# EAGLE board Safety Sensors (EAGLE 7.6.0)

Size 73.58 x 190.39 mm. Coordinates in mm from the lower left corner, seen from the top.
Outline: 0,0 56.82,0 56.82,53.33 0,53.33 0,0
Copper layers (1*16): Top 0.035mm / dielectric 1.5mm / Bottom 0.035mm
Design rules "default": minimum track width 10mil, minimum drill 24mil, track to track 8mil, track to pad 8mil, pad to pad 8mil, via to via 8mil, smd to smd 8mil, copper to edge 40mil, drill to drill 8mil, minimum pad ring 10mil, minimum via ring 8mil, stop-mask expansion 4mil, vias tented up to drill 0mil, thermal gap 10mil

## Footprints (pad centres in the part's own frame; a part is rotated, then mirrored left to right if it is on the bottom)
LED-RGB-THRU = drill 0.762 pad 0.889 long: 1 1.905,0; 2 0.635,0; 3 -0.635,0; 4 -1.905,0
SNR6-D19.0MM = drill 1.3 pad 2: 1 -3.355,3.355; 2 -3.355,-3.355; 3 3.355,3.355; 4 3.355,-3.355; 5 0,4.75; 6 0,-4.75
PIEZO-22MM = drill 1 pad 2.54: P$1 -5,0; P$2 5,0
0207/10 = drill 0.813 octagon: 1 -5.08,0; 2 5.08,0
B25V = drill 0.813 long: A 2.54,0.635; E -2.54,0.635; S 0,0.635
SW2-12.7-12.0X3.6X3.6MM = drill 0.8 square: 1 6.35,0 | drill 0.8: 2 -6.35,0
ARDUINO_UNO = drill 1.016 pad 1.88: 0 63.5,50.8; 1 60.96,50.8; 2 58.42,50.8; 3 55.88,50.8; 3.3V 35.56,2.54; 4 53.34,50.8; 5 50.8,50.8; 5V 38.1,2.54; 6 48.26,50.8; 7 45.72,50.8; 8 41.656,50.8; 9 39.116,50.8; 10 36.576,50.8; 11 34.036,50.8; 12 31.496,50.8; 13 28.956,50.8; A0 50.8,2.54; A1 53.34,2.54; A2 55.88,2.54; A3 58.42,2.54; A4 60.96,2.54; A5 63.5,2.54; AREF 23.876,50.8; GND 26.416,50.8; GND. 43.18,2.54; GND.. 40.64,2.54; I/OREF 30.48,2.54; N/C 27.94,2.54; RESET 33.02,2.54; SCL 18.796,50.8; SDA 21.336,50.8; VIN 45.72,2.54 | hole 3.2: 66.04,7.62; 66.04,35.56; 15.24,50.8; 13.97,2.54
TO92 = drill 0.813 octagon: 1 1.27,0; 2 0,1.905; 3 -1.27,0
1X16P-2.54-2.54-11.6-3.0-BLACK-MALE = drill 0.889 pad 1.651 square: 1 0,19.05 | drill 0.889 pad 1.651: 2 0,16.51; 3 0,13.97; 4 0,11.43; 5 0,8.89; 6 0,6.35; 7 0,3.81; 8 0,1.27; 9 0,-1.27; 10 0,-3.81; 11 0,-6.35; 12 0,-8.89; 13 0,-11.43; 14 0,-13.97; 15 0,-16.51; 16 0,-19.05

## Placement (x,y rotation side)
D2  [LED-RGB-THRU]  5,124.38 0 top
GAS2  [SNR6-D19.0MM]  5,73.58 0 top
PIEZO1  [PIEZO-22MM]  5,187.88 0 top
PIEZO3  [PIEZO-22MM]  5,111.68 0 top
R1  220‎Ω  [0207/10]  5,86.28 0 top
R2  220‎Ω  [0207/10]  5,60.88 0 top
R3  20k‎Ω  [0207/10]  5,98.98 0 top
R4  220‎Ω  [0207/10]  5,200.58 0 top  (outside the outline)
R5  220‎Ω  [0207/10]  5,213.28 0 top  (outside the outline)
R6  220‎Ω  [0207/10]  5,225.98 0 top  (outside the outline)
Rpot2  300k‎Ω  [B25V]  5,48.18 0 top
TILT1  [SW2-12.7-12.0X3.6X3.6MM]  5,149.78 0 top
TILT2  [SW2-12.7-12.0X3.6X3.6MM]  5,162.48 0 top
TILT3  [SW2-12.7-12.0X3.6X3.6MM]  5,175.18 0 top
U1  [ARDUINO_UNO]  5,137.08 0 top
U3  [TO92]  5,10.08 0 top
U7  [ARDUINO_UNO]  5,22.78 0 top
U8  [1X16P-2.54-2.54-11.6-3.0-BLACK-MALE]  5,35.48 0 top

## Library data of the parts
D2 GAS2 PIEZO1 PIEZO3 R1-R6 Rpot2 TILT1-TILT3 U1 U3 U7 U8 = AUTODESK_CIRCUITS_BREADBOARD

## Nets
N$1: U7.12 U8.4
N$2: U7.11 U8.6
N$3: U7.5 U8.11
N$4: U7.4 U8.12
N$5: U7.3 U8.13
N$6: U7.2 U8.14
N$7: Rpot2.S U8.3
N$8: R2.2 U8.15
N$9: U3.2 U7.A0
N$10: U3.1 U7.GND.
N$11: GAS2.1 GAS2.3 R3.1 U7.A1
N$12: PIEZO3.P$1 U7.6
N$13: D2.3
N$14: D2.4 U7.8
N$15: D2.1 U7.7
N$16: D2.2 R1.2
N$17: GAS2.5 PIEZO3.P$2 R1.1 R3.2 Rpot2.E U7.GND.. U8.1 U8.5 U8.16
N$18: GAS2.2 GAS2.4 GAS2.6 R2.1 Rpot2.A U3.3 U7.5V U8.2
N$19: PIEZO1.P$2 U1.GND
N$20: PIEZO1.P$1 U1.10
N$21: TILT1.1 TILT2.1 TILT3.1 U1.5V
N$22: R4.2 R5.2 R6.2 U1.GND.
N$23: R5.1 TILT1.2 U1.A0
N$24: R6.1 TILT2.2 U1.A1
N$25: R4.1 TILT3.2 U1.A2

## Tracks (layer width: path | path; a pad name or v marks a point on that pad's centre or on a via)
N$1  (1 unrouted)
N$2  (1 unrouted)
N$3  (1 unrouted)
N$4  (1 unrouted)
N$5  (1 unrouted)
N$6  (1 unrouted)
N$7  (1 unrouted)
N$8  (1 unrouted)
N$9  (1 unrouted)
N$10  (1 unrouted)
N$11  (3 unrouted)
N$12  (1 unrouted)
N$14  (1 unrouted)
N$15  (1 unrouted)
N$16  (1 unrouted)
N$17  (8 unrouted)
N$18  (7 unrouted)
N$19  (1 unrouted)
N$20  (1 unrouted)
N$21  (3 unrouted)
N$22  (3 unrouted)
N$23  (2 unrouted)
N$24  (2 unrouted)
N$25  (2 unrouted)